# EAGLE board qPCR_pcb_module_array_led (EAGLE 9.6.1)

Size 100 x 36 mm. Coordinates in mm from the lower left corner, seen from the top.
Outline: 0,0 100,0 100,36 0,36 0,0
Copper layers (1*16): Top 0.035mm / dielectric 1.5mm / Bottom 0.035mm
Design rules "default": minimum track width 6mil, minimum drill 0.35mm, track to track 6mil, track to pad 6mil, pad to pad 6mil, via to via 6mil, smd to smd 6mil, copper to edge 40mil, drill to drill 6mil, minimum pad ring 10mil, minimum via ring 8mil, stop-mask expansion 4mil, vias tented up to drill 0mil, thermal gap 10mil

## Footprints (pad centres in the part's own frame; a part is rotated, then mirrored left to right if it is on the bottom)
LED5MM = drill 0.813 octagon: A -1.27,0; K 1.27,0
TF31-18S-0.5SH(800) = smd 1.9 x 2.2: EPAD1 1.95,3.25; EPAD2 -10.45,3.25 | smd 0.3 x 1.3: P$1 0,0; P$2 -0.5,0; P$3 -1,0; P$4 -1.5,0; P$5 -2,0; P$6 -2.5,0; P$7 -3,0; P$8 -3.5,0; P$9 -4,0; P$10 -4.5,0; P$11 -5,0; P$12 -5.5,0; P$13 -6,0; P$14 -6.5,0; P$15 -7,0; P$16 -7.5,0; P$17 -8,0; P$18 -8.5,0

## Placement (x,y rotation side)
LED1  [LED5MM]  3.81,7.84 0 top
LED2  [LED5MM]  3.81,0.22 0 top
LED3  [LED5MM]  3.81,-7.4 0 top  (outside the outline)
LED4  [LED5MM]  3.81,-15.02 0 top  (outside the outline)
LED5  [LED5MM]  3.81,-22.64 0 top  (outside the outline)
LED6  [LED5MM]  3.81,-30.26 0 top  (outside the outline)
LED7  [LED5MM]  3.81,-37.88 0 top  (outside the outline)
LED8  [LED5MM]  3.81,-45.5 0 top  (outside the outline)
LED9  [LED5MM]  16.51,-75.98 0 top  (outside the outline)
LED10  [LED5MM]  3.81,-53.12 0 top  (outside the outline)
LED11  [LED5MM]  3.81,-75.98 0 top  (outside the outline)
LED12  [LED5MM]  16.51,-53.12 0 top  (outside the outline)
LED13  [LED5MM]  3.81,-60.74 0 top  (outside the outline)
LED14  [LED5MM]  16.51,-60.74 0 top  (outside the outline)
LED15  [LED5MM]  3.81,-68.36 0 top  (outside the outline)
LED16  [LED5MM]  16.51,-68.36 0 top  (outside the outline)
U$1  TF31-18S-0.5SH(800)  [TF31-18S-0.5SH(800)]  9.8,18.58 180 top

## Library data of the parts
LED1-LED16 = led
U$1 = Ninja_qPCR

## Nets
5V: LED1.A LED2.A LED3.A LED4.A LED5.A LED6.A LED7.A LED8.A LED9.A LED10.A LED11.A LED12.A LED13.A LED14.A LED15.A LED16.A U$1.P$1
GND: U$1.EPAD1 U$1.EPAD2 U$1.P$18
OUT1: LED1.K U$1.P$2
OUT2: LED2.K U$1.P$3
OUT3: LED3.K U$1.P$4
OUT4: LED4.K U$1.P$5
OUT5: LED5.K U$1.P$6
OUT6: LED6.K U$1.P$7
OUT7: LED7.K U$1.P$8
OUT8: LED8.K U$1.P$9
OUT9: LED9.K U$1.P$10
OUT10: LED10.K U$1.P$11
OUT11: LED11.K U$1.P$12
OUT12: LED12.K U$1.P$13
OUT13: LED13.K U$1.P$14
OUT14: LED14.K U$1.P$15
OUT15: LED15.K U$1.P$16
OUT16: LED16.K U$1.P$17

## Tracks (layer width: path | path; a pad name or v marks a point on that pad's centre or on a via)
5V  (16 unrouted)
GND  (2 unrouted)
OUT1  (1 unrouted)
OUT2  (1 unrouted)
OUT3  (1 unrouted)
OUT4  (1 unrouted)
OUT5  (1 unrouted)
OUT6  (1 unrouted)
OUT7  (1 unrouted)
OUT8  (1 unrouted)
OUT9  (1 unrouted)
OUT10  (1 unrouted)
OUT11  (1 unrouted)
OUT12  (1 unrouted)
OUT13  (1 unrouted)
OUT14  (1 unrouted)
OUT15  (1 unrouted)
OUT16  (1 unrouted)